# Altium PCB SMINVT VER1.PcbDoc
Units mm, origin at the board's own origin, x right, y up, seen from the top; angles counter-clockwise.
Board outline 201.55 x 45.47 mm, 2 copper layers (Top Layer, Bottom Layer); 78 components, 45 nets, 205 pads, 12 vias.
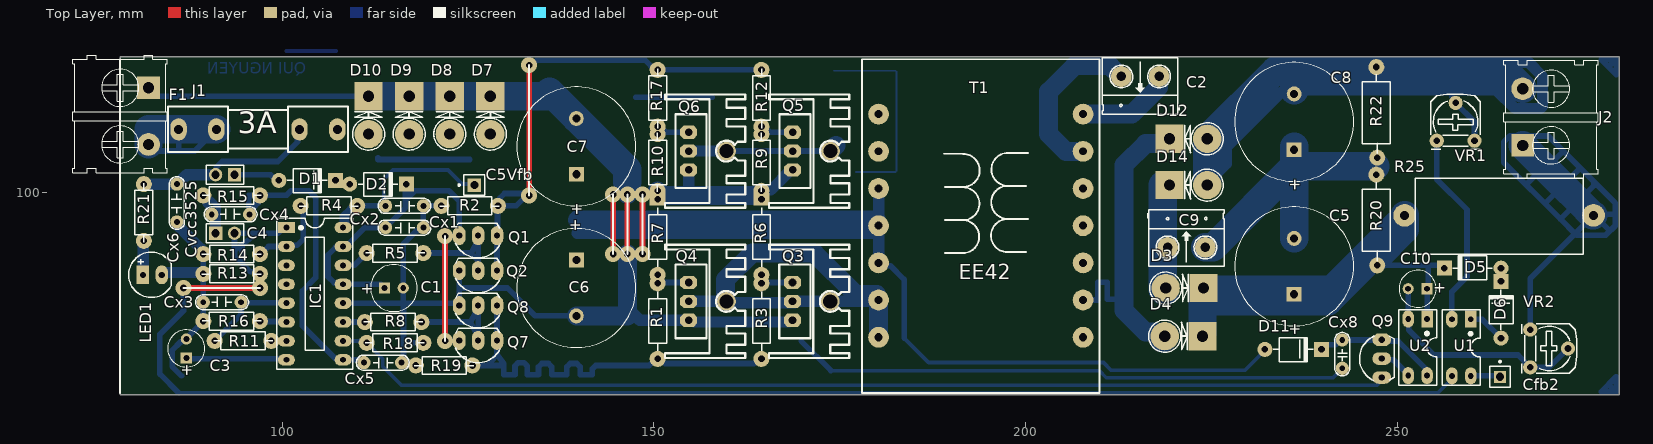
[diagram p0: Top Layer view]
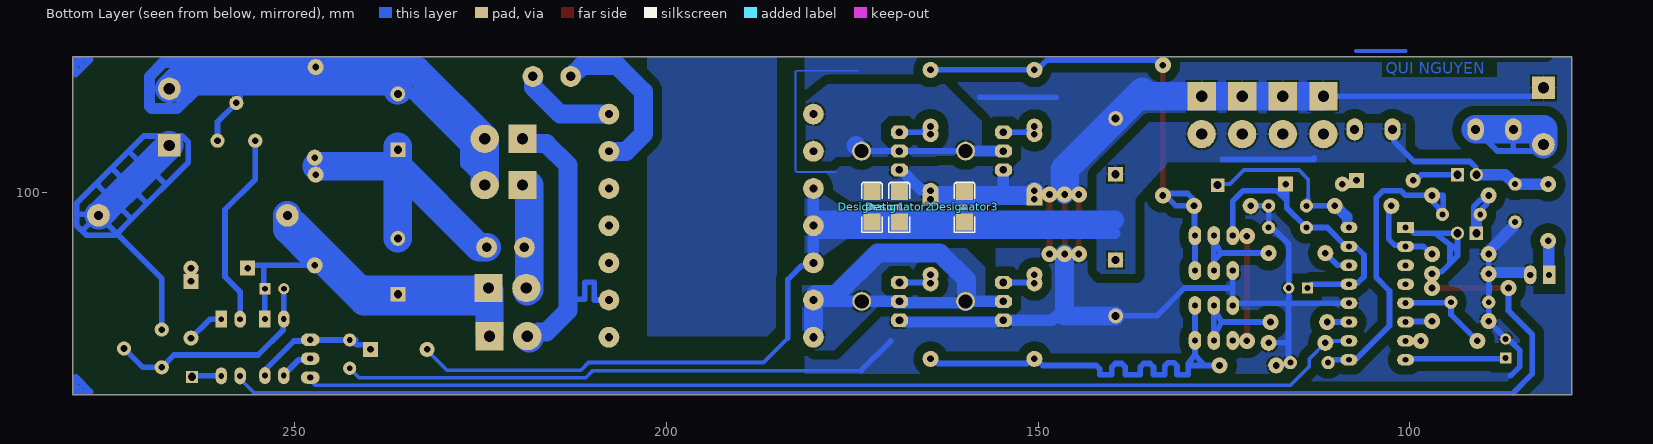
[diagram p1: Bottom Layer view, seen from below]

## Layer stack, top to bottom
Top Solder: solder mask 0.0102, Solder Resist, Dk 3.5
Top Layer: signal copper 0.0356
Dielectric 1: dielectric 0.32, FR-4, Dk 4.8
Bottom Layer: signal copper 0.0356
Bottom Solder: solder mask 0.0102, Solder Resist, Dk 3.5

## Board outline
78.232,72.771 78.232,118.237 279.781,118.237 279.781,72.771

## Design rules (kind name [scope] priority, off if disabled: settings)
Clearance [All] p1: gap=0.254 ignorepadtopadclearanceinfootprint=FALSE except(0: Arc-Hole Track-Hole SMDPad-Hole THPad-Hole Via-Hole Fill-Hole Poly-Hole Region-Hole Text-Hole; 1.27: Arc-Fill Arc-Poly Arc-Region Track-Fill Track-Poly Track-Region SMDPad-Fill SMDPad-Poly SMDPad-Region THPad-Fill THPad-Poly THPad-Region Via-Fill Via-Poly Via-Region Fill-Fill Fill-Poly Fill-Region Poly-Poly Poly-Region Region-Region)
PolygonConnect [All] p1: connectstyle=Relief reliefconductorwidth=0.254 reliefentries=4 polygonreliefangle="90 Angle" airgapwidth=0.254
RoutingVias [All] p1: holewidth=0.711 width=1.27 viastyle="Through Hole" minholewidth=0.711 minwidth=1.27 maxholewidth=0.711 maxwidth=1.27
SolderMaskExpansion [All] p1: expansion=0.102 istentingtop=FALSE
Width [All] p1: maxlimit=3.81 minlimit=0.762 preferedwidth=1.524
30 further rules are at their usual default settings.

## Components (designator, comment, footprint, x,y, rotation, side; value= is the part's Value field where it differs from the comment)
C1 "6.3R" CA-ALU-6.3R 115.042,87.122 r0 top value=104
C2 "Header 2" HED2 217.932,115.57 r180 top
C3 "10uF" CA-ALU-5L 87.122,78.994 r90 top value=104
C4 "JP2" JP2-D1T 91.059,94.488 r0 top
C5 "CN-ALU-DIP" CA-ALU-16 236.093,90.043 r90 top value=104
C5Vfb "JP1" JP1-D1T#1 125.857,100.965 r90 top
C6 "CN-ALU-DIP" CA-ALU-16 139.573,87.122 r270 top locked value=104
C7 "CN-ALU-DIP" CA-ALU-16 139.573,106.172 r90 top value=104
C8 "CN-ALU-DIP" CA-ALU-16 236.093,109.474 r90 top value=104
C9 "Header 2" HED2 219.075,92.583 r0 top
C10 "10uF" CA-ALU-5L 252.701,87.024 r180 top value=104
Cfb2 "JPvfb" JP1-D1T#2 263.779,75.184 r0 top
Cvcc3525 "JP2" JP2-D1T 93.599,102.362 r180 top
Cx1 "XXpF" CN2-O 116.459,95.123 r180 top value=33pF
Cx2 "100nF" CN2-O 116.459,98.044 r180 top value=33pF
Cx3 "1nF" CN2-O 91.948,85.344 r0 top value=33pF
Cx4 "1nF" CN2-O 93.091,97.155 r0 top value=33pF
Cx5 "1nF" CN2-O 113.538,76.962 r180 top value=33pF
Cx6 "100nF" CN2-O 85.725,98.552 r90 top value=33pF
Cx8 "XXpF" CN1.5 242.57,78.105 r90 top value=33pF
D1 "Diode" DIO-1A-SMALL 98.298,101.6 r180 top value=1N5007
D2 "Diode" DIO-1A-SMALL 107.823,101.092 r180 top value=1N5007
D3 "5AN" DIO-5AN 223.901,87.122 r180 top value=1N5007
D4 "5AN" DIO-5AN 223.774,80.645 r180 top value=1N5007
D5 "Diode" DIO-1A-SMALL 265.176,89.789 r0 top value=1N5007
D6 "Diode" DIO-1A-SMALL 263.906,79.121 r270 top value=1N5007
D7 "5AN" DIO-5AN 128.016,112.903 r270 top value=1N5007
D8 "5AN" DIO-5AN 122.555,112.903 r270 top value=1N5007
D9 "5AN" DIO-5AN 117.094,112.903 r270 top value=1N5007
D10 "5AN" DIO-5AN 111.633,112.903 r270 top value=1N5007
D11 "Diode" DIO-1A-SMALL 230.886,78.867 r180 top value=1N5007
D12 "5AN" DIO-5AN 219.329,107.188 r0 top value=1N5007
D14 "5AN" DIO-5AN 219.329,100.965 r0 top value=1N5007
Designator1 "Comment" DIO-SMD-106 172.339,98.044 r270 bottom
Designator2 "Comment" DIO-SMD-106 168.656,98.044 r270 bottom
Designator3 "Comment" DIO-SMD-106 159.893,98.044 r270 bottom
F1 "F1A" Fuse1 96.774,108.458 r0 top value=Fuse
IC1 "KA3525A" DIP16 100.584,95.25 r270 top
J1 "KF2" KF2-7.62 78.232,110.236 r270 top
J2 "OUT OSC" KF2-7.62 270.637,110.109 r90 top
LED1 "LED" LED-5-BLUE 82.423,88.9 r0 top value="LED 3 ly Single Colour"
Q1 "S9014" TO92-123 126.365,94.17 r180 top value=C9014
Q2 "C9015" QTO-92 126.365,89.471 r180 top
Q3 "IRF840" TO220H3 168.638,87.866 r270 top
Q4 "IRF840" TO220H3 154.668,87.866 r270 top
Q5 "IRF840" TO220H3 168.656,108.077 r270 top
Q6 "IRF840" TO220H3 154.668,108.077 r270 top
Q7 "S9014" TO92-123 126.365,80.073 r180 top value=C9014
Q8 "C9015" QTO-92 126.365,84.772 r180 top
Q9 "MCR100" TO92-123 247.875,77.626 r90 top value=C9014
R1 "Res" RES-1/4W#1 150.622,83.058 r90 top
R2 "10K" RES-1/4W-SMALL 124.968,98.171 r0 top
R3 "Res" RES-1/4W#1 164.592,83.058 r90 top
R4 "10K" RES-1/4W-SMALL 106.045,98.171 r0 top
R5 "10" RES-1/4W-SMALL 115.443,91.821 r180 top
R6 "Res" RES-1/4W#2 164.592,94.361 r90 top
R7 "Res" RES-1/4W#2 150.622,94.361 r90 top
R8 "10" RES-1/4W-SMALL 115.189,82.55 r180 top
R9 "10K" RES-1/4W-SMALL 164.465,104.267 r270 top
R10 "10K" RES-1/4W-SMALL 150.495,104.267 r270 top
R11 "27" RES-1/4W-SMALL 94.996,80.01 r180 top
R12 "10" RES-1/4W-SMALL 164.465,112.395 r90 top
R13 "1K" RES-1/4W-SMALL 92.964,89.027 r0 top
R14 "10K" RES-1/4W-SMALL 92.964,91.694 r0 top
R15 "470K" RES-1/4W-SMALL 93.472,99.568 r180 top
R16 "12K" RES-1/4W-SMALL 93.472,82.677 r180 top
R17 "10" RES-1/4W-SMALL 150.495,112.395 r90 top
R18 "Res" RES-1/4W-SMALL 114.935,79.756 r0 top
R19 "10K" RES-1/4W-SMALL 121.539,76.708 r0 top
R20 "220k" RES-1/2W 247.142,95.758 r90 top
R21 "10" RES-1/4W-SMALL 81.407,97.028 r90 top
R22 "220k" RES-1/2W 247.142,110.236 r90 top
R25 "5W" RES-5W 264.414,96.647 r0 top
T1 "EE42" "EE42 - ST9x9" 180.213,75.504 r0 top
U1 "PC817" DIP4 259.842,82.931 r180 top
U2 "PC817" DIP4 253.971,82.96 r180 top
VR1 "20K" VR-S2 255.27,106.934 r0 top value="Volume 50k"
VR2 "20K" VR-S2 267.843,81.534 r270 top value="Volume 50k"

## Footprints (in the part's own frame and the unit in brackets; to place one, negate y for a bottom-side part, rotate by r counter-clockwise, add the part's x,y. Pads: shape width x height; smd on the part's side, far side on the other; paste and mask are expansions set on the pad)
CA-ALU-5L [mm] "Polarized capacitors, Aluminum Electrolytic Capacitors, 2-Leads, Body 5x11x2x0.5"
  rect 1.5x1.5 hole 0.8: 1(-1.27,0)
  round 1.5 hole 0.8: 2(1.27,0)
  silkscreen extent -2.5,-2.5 2.5,2.5, body extent -2.54,-2.54 2.54,2.54, height 13.9
CA-ALU-6.3R [mm] "Polarized capacitors, Aluminum Electrolytic Capacitors, 2-Leads, Body 6.3x15x2.5x0.5"
  rect 1.5x1.5 hole 0.8: 1(-1.25,0)
  round 1.5 hole 0.8: 2(1.25,0)
  silkscreen extent -3.15,-3.15 3.15,3.15, body extent -3.12,-3.13 3.14,3.15, height 15.26
CA-ALU-16 [mm] "Polarized capacitors, Aluminum Electrolytic Capacitors, 2-Leads, Body 16x21x7.5x0.8"
  rect 2x2 hole 1.1: 1(-3.75,0)
  round 2 hole 1.1: 2(3.75,0)
  silkscreen extent -8,-8 8,8, body extent -7.93,-7.96 7.99,8, height 21.31
CN1.5 [mil]
  round 70 hole 31: 1(-70,0) 2(80,0)
  silkscreen extent -110,-40 120,40, body extent -110,-33 120,33, height 235
CN2-O [mil]
  round 70 hole 31: 1(-100,-5) 2(100,-5)
  silkscreen extent -140,-45 140,35, body extent -139,-56 139,46, height 360
DIO-1A-SMALL [mil] "Diode 1A, W 100mil, L 350mil"
  round 80 hole 35: 1(-50,0)
  rect 80x80 hole 35: 2(-350,0)
  silkscreen extent -305,-61 -95,65, body extent -366,-61 -34,65, height 122
DIO-5AN [mil] "Diode 5A, W 200mil, L 250mil"
  round 150 hole 60: 1(200,0)
  rect 150x150 hole 60: 2(0,0)
  silkscreen extent 81,-85 285,85, body extent -32,-111 222,90, height 451
DIO-SMD-106 [mil]
  rect 90x90.55 smd: 1(80,0) 2(-80,0)
  silkscreen extent -130,-55 135,55, body extent -99,-50 106,52, height 95
DIP4 [mil]
  rect 60x90 hole 31: 1(0,0)
  oval 60x90 hole 31: 2(100,0) 3(100,300) 4(0,300)
  silkscreen extent -50,-50 150,350, body extent -59,-10 159,305, height 170
DIP16 [mil]
  rect 60x90 hole 31: 1(0,0)
  oval 60x90 hole 31: 2(100,0) 3(200,0) 4(300,0) 5(400,0) 6(500,0) 7(600,0) 8(700,0) 9(700,300) 10(600,300) 11(500,300) 12(400,300) 13(300,300) 14(200,300) 15(100,300) 16(0,300)
  silkscreen extent -50,-50 750,350, body extent -52,-53 752,360, height 317
"EE42 - ST9x9" [mm]
  rect 0x0 all layers, no hole: 1(0,0)
  round 2.8 hole 1.08: 2(0,5) 3(0,10) 4(0,15) 5(0,20) 6(0,25) 8(0,35) 11(27.5,35) 13(27.5,25) 14(27.5,20) 15(27.5,15) 16(27.5,10) 17(27.5,5)
  round 2.8 hole 1.05: 7(0,30) 12(27.5,30)
  round 0 all layers, no hole: 9(0,40) 10(27.5,40) 18(27.5,0)
  silkscreen extent -2.25,-2.5 29.7,42.38, body extent -2.33,-2.54 29.77,42.46, height 46.62
Fuse1 [mm]
  oval 2.2x3 hole 1.2: 1(-10.684,0) 1(-5.604,0) 2(5.579,0) 2(10.659,0)
  silkscreen extent -12.12,-3.05 12.09,3.05, body extent -10.84,-2.95 10.87,2.95, height 9.75
HED2 [mil] "Header 2, 2 pin, hight 300mil, Pin to Pin 200, Colour Green"
  round 110 hole 50: 1(0,0) 2(200,0)
  silkscreen extent -106,-100 300,200, body extent -92,-90 302,205, height 394
JP1-D1T#1 [mm] "1pins, 1 row, straight, gold plating"
  rect 1.8x1.8 hole 1.1: 1(0,0)
  silkscreen extent -1.4,-1.4 1.4,2.17, body extent -1.27,-1.27 1.27,1.27, height 8.54
JP1-D1T#2 [mm] "1pins, 1 row, straight, gold plating"
  rect 1.6x1.6 hole 1.1: 1(0,0)
  silkscreen extent -1.4,-1.4 1.4,2.17, body extent -1.27,-1.27 1.27,1.27, height 8.54
JP2-D1T [mm] "2 pins, 1 row, straight, gold plating"
  rect 1.8x1.8 hole 1.1: 1(0,0)
  round 1.8 hole 1.1: 2(2.54,0)
  silkscreen extent -1.27,-1.27 3.81,1.27, body extent -1.27,-1.27 3.81,1.27, height 8.54
KF2-7.62 [mil]
  rect 120x120 hole 59.06 unplated: 1(-150,150)
  round 120 hole 59.06 unplated: 2(150,150)
  silkscreen extent -324,-250 300,250, body extent -300,-241 300,231, height 337
LED-5-BLUE [mil] "LED 2 PIN, 5 ly , Only colour, pin to pin 110mil"
  rect 65x100 hole 32: 1(-45,0)
  oval 65x100 hole 32: 2(55,0)
  silkscreen extent -120,-120 104,120, body extent -113,-120 100,117, height 339
QTO-92 [mil] "TO-92"
  oval 66x100 hole 32: 1(-100,0) 2(0,0) 3(100,0)
  silkscreen extent -117,-65 120,118, body extent -109,-66 109,95, height 245
RES-1/2W [mil]
  round 85 hole 35: 1(-220,-5) 2(260,0)
  silkscreen extent -195,-74 221,75, body extent -230,-60 270,56, height 121
RES-1/4W#1 [mil]
  round 85 hole 35: 1(-215,5) 2(185,5)
  silkscreen extent -173,-42 141,52, body extent -227,-42 197,52, height 95
RES-1/4W#2 [mil]
  round 85 hole 35: 1(-215,5)
  rect 66.93x85 hole 35: 2(185,5)
  silkscreen extent -173,-42 141,52, body extent -227,-42 197,52, height 95
RES-1/4W-SMALL [mil]
  round 85 hole 35: 1(-140,0) 2(160,0)
  silkscreen extent -148,-47 166,47, body extent -152,-47 172,47, height 97
RES-5W [mil] "R5W , 2 pin, 400 x 950mil"
  round 120 hole 47.24: 1(-530,10) 2(470,10)
  silkscreen extent -475,-195 415,205, body extent -550,-185 490,197, height 363
TO92-123 [mil] "TO-92"
  oval 66x100 hole 32: 1(-100,0) 2(0,0) 3(100,0)
  silkscreen extent -117,-65 120,118, body extent -109,-66 109,95, height 245
TO220H3 [mil] "TO-220 1-2-3"
  oct 70x90 hole 40: 1(0,0) 2(100,0) 3(200,0)
  round 100 hole 75: 2(100,200)
  silkscreen extent -200,-125 400,300, body extent -190,-102 392,323, height 984
VR-S2 [mil] "Resistor Variable"
  round 75 hole 35: 1(0,0) 2(100,200) 3(200,0)
  silkscreen extent -31,-44 231,246, body extent -87,-30 307,372, height 165

## Part data
C1 C3 C10: library part CN-ALU-DIP, "Capacitor (Semiconductor SIM Model)", LatestRevisionDate=17-Jul-2002, LatestRevisionNote="Re-released for DXP Platform.", PackageReference=C1206, Publisher="Altium Limited"
C2 C9: "Header 2 (Green)"
C4 C5Vfb Cvcc3525: "WR-PHD 2.54 mm Angled Socket Header", Manufacturer="W¨¹rth Elektronik eiSos GmbH", partNo=613002143121, ComponentLink1 Description=Manufacturer, ComponentLink1URL=http://www.we-online.com, ComponentLink2 Description=Datasheet, ComponentLink2URL=http://katalog.we-online.de/em/datasheet/6130xx143121.pdf, Created by="Karrer Zheng", Created Date="29 March 2013", NoPins=02
C5 C6 C7 C8: "Capacitor (Semiconductor SIM Model)", LatestRevisionDate=17-Jul-2002, LatestRevisionNote="Re-released for DXP Platform.", PackageReference=C1206, Publisher="Altium Limited"
Cfb2: library part JP1, "WR-PHD 2.54 mm Angled Socket Header", Manufacturer="W¨¹rth Elektronik eiSos GmbH", partNo=613002143121, ComponentLink1 Description=Manufacturer, ComponentLink1URL=http://www.we-online.com, ComponentLink2 Description=Datasheet, ComponentLink2URL=http://katalog.we-online.de/em/datasheet/6130xx143121.pdf, Created by="Karrer Zheng", Created Date="29 March 2013", NoPins=02
Cx1 Cx2 Cx3 Cx4 Cx5 Cx6 Cx8: library part CN
D1 D2 D5 D6 D11: "Default Diode", Code - JEDEC=DO-214-AB, Published=8-Jun-2000, Publisher="Altium Limited", Revision="July-2002: Re-released for DXP Platform."
D3 D4 D7 D8 D9 D10 D12 D14: library part Diode, "Default Diode", Code - JEDEC=DO-214-AB, Published=8-Jun-2000, Publisher="Altium Limited", Revision="July-2002: Re-released for DXP Platform."
F1: library part Fuse, "Fuse", Designed by=VanDungEvn
IC1: "SMPS Controller"
J1: Manufacturer="Würth Elektronik eiSos GmbH", partNo=691103110002, ComponentLink1 Description=Manufacturer, ComponentLink1URL=http://www.we-online.com, ComponentLink2 Description=Datasheet, ComponentLink2URL=http://katalog.we-online.de/em/datasheet/6911031100xx.pdf, Created by="Karrer Zheng", Created Date="29 October 2013", NoPins=2
J2: library part KF2, Manufacturer="Würth Elektronik eiSos GmbH", partNo=691103110002, ComponentLink1 Description=Manufacturer, ComponentLink1URL=http://www.we-online.com, ComponentLink2 Description=Datasheet, ComponentLink2URL=http://katalog.we-online.de/em/datasheet/6911031100xx.pdf, Created by="Karrer Zheng", Created Date="29 October 2013", NoPins=2
LED1: "LED Single colour Green and Red"
Q1 Q7: "PNP 600mW, EBC"
Q2 Q8: library part C9013, "PNP 600mW, EBC"
Q3 Q4 Q5 Q6: "MOSFET N - CHANNEL 500V - 0.75 - 8A - TO-220"
Q9: library part S9014, "PNP 600mW, EBC"
R1 R3 R6 R7 R18: Manufacturer="Generic Components", Class=Passive, Published=08/06/2000, Publisher="Altium Hobart Technology Centre", SubClass=R
R2 R4 R5 R8 R9 R10 R11 R12 R13 R14 R15 R16 R17 R19 R20 R21 R22 R25: library part Res, "Res", Manufacturer="Generic Components", Class=Passive, Published=08/06/2000, Publisher="Altium Hobart Technology Centre", SubClass=R
T1: "Bien ap xung ee42"
U1 U2: "Single Opto"
VR1 VR2: library part VR-S, "Var Resistor"

## Via types
v1: diameter 2.159, hole 0.889, Top Layer to Bottom Layer, 12 vias

## Nets (pads, with @x,y where several pads share a name; then routed paths per layer and width w, separated by ;. In a path a pad name is that pad's centre, name@x,y a point inside that pad or via, vN(x,y) a via of type N, cw(c..) or ccw(c..) an arc to the next point about the centre after c; other vN are vias at no path point)
+5: C5Vfb.1 Cx2.2 IC1.16 R4.2 | length 28.9
  Bottom Layer w0.508: 113.665,99.125 113.665,101.727 114.935,102.997 122.301,102.997 124.206,101.092 C5Vfb.1@125.73,101.092
  Bottom Layer w0.762: 113.725,99.066 113.725,98.365 Cx2.2 R4.2 ; C5Vfb.1@125.73,101.092 C5Vfb.1 ; R4.2 109.842,97.904 109.207,97.904 108.077,96.774 108.077,95.377 IC1.16 108.379,95.25 108.731,95.602 108.731,96.415 110.109,97.793 R4.2
+12: C6.1 C7.1 Cvcc3525.2 Cx6.2 D7.1 D8.1 D9.1 D10.1 D11.1 Designator1.1 Designator2.1 Designator3.1 F1.2 R21.2 T1.4 T1.5 T1.6 | length 191.4
  Bottom Layer w0.508: 183.642,80.391 186.944,77.089 210.439,77.089 211.455,76.073 229.489,76.073 D11.1@232.41,78.994
  Bottom Layer w0.762: 91.136,103.328 91.948,104.14 99.441,104.14 102.077,106.776 102.077,108.183 F1.2@102.353,108.458 ; 112.903,104.648 112.903,104.394 125.222,104.394 ; T1.4 180.603,90.114 181.793,90.114 183.642,88.265 183.642,80.391
  Bottom Layer w1.524: R21.2 Cx6.2 85.921,101.092 87.191,102.362 Cvcc3525.2 ; 139.7,94.488 T1.5@179.959,94.488 ; T1.4 180.213,94.488 T1.5 T1.6
  Bottom Layer w2.54: 139.7,96.266 156.845,96.266 168.529,96.266 172.212,96.266 173.609,96.266 175.006,96.266 T1.5@179.959,96.266
+300: C5.1 C10.1 D3.2 D4.2 D5.2 R20.1 R25.1 U2.1 | length 84.8
  Bottom Layer w0.762: R20.1 254.127,90.17 ; U2.1 C10.1 254.127,87.024 254.127,90.17 ; D5.2@255.651,89.154 D5.2 256.286,90.17 254.127,90.17
  Bottom Layer w1.524: D3.2 224.79,88.011 240.665,88.011 244.157,91.504 249.263,96.609 250.66,96.609 R25.1
  Bottom Layer w3.81: D4.2@223.774,81.026 D3.2@223.774,86.773 ; D3.2@224.282,85.344 236.093,85.344 240.665,85.344 241.998,86.677 245.491,90.17 ; 247.269,91.313 250.952,94.996 R25.1
-300: C8.2 D12.1 D14.1 J2.2 R22.2 VR1.2 VR1.3 | length 129.8
  Bottom Layer w0.762: 258.445,116.332 257.302,115.189 257.302,113.665 257.302,112.831 257.81,112.323 VR1.2 260.35,109.474 VR1.3
  Bottom Layer w1.524: D14.1 224.409,101.304 226.949,103.844 226.949,106.045 234.311,113.407 235.781,113.407 235.873,113.315 C8.2@235.964,113.315 ; C8.2 236.661,113.792 263.271,113.792 265.811,111.252 269.189,111.252 269.494,111.557 269.494,115.57 267.589,117.475 264.16,117.475
  Bottom Layer w3.81: D14.1@224.409,101.304 D12.1@224.409,106.934 ; D12.1 233.523,116.302 233.553,116.332 236.093,116.332 ; C8.2@236.093,113.732 236.093,116.332 ; J2.2 264.414,116.332 258.445,116.332 247.142,116.332 236.093,116.332
AC1: D4.1 D12.2 T1.16 | length 44.6
  Bottom Layer w0.762: T1.16 209.677,85.504 209.677,87.884 210.947,87.884 210.947,85.598 213.139,85.598 213.139,85.504
  Bottom Layer w1.524: 213.139,85.504 213.233,85.598 213.487,85.852
  Bottom Layer w2.54: D4.1@218.683,80.888 217.553,80.888 217.247,81.194 216.113,81.194 213.233,84.074 213.233,85.598 213.233,103.668 216.118,106.553 218.694,106.553 D12.2@218.694,107.061
  Bottom Layer w3.81: D4.1@218.426,80.377 D4.1
FB: C4.2 IC1.1 R13.2 U1.3 | length 219.9
  Top Layer w0.762: v1(86.741,87.122) v1(97.028,87.122)
  Bottom Layer w0.508: 86.106,73.025 255.397,73.025 257.302,74.93 U1.3
  Bottom Layer w0.762: 86.106,73.025 83.566,75.565 83.566,80.899 86.741,84.074 v1(86.741,87.122) ; 94.615,92.837 94.615,90.678 94.361,90.678 ; 96.444,94.336 93.599,92.202 ; R13.2 96.761,89.294 95.745,89.294 94.361,90.678 ; IC1.1 100.203,95.25 99.441,94.488 C4.2 93.599,92.202 ; 93.599,92.202 93.599,91.44 94.361,90.678
GND: C1.2 C3.2 C6.2 C7.2 Cx1.1 Cx2.1 Cx3.1 Cx5.1 Cx6.1 Cx8.1 D7.2 D8.2 D9.2 D10.2 Designator1.2 Designator2.2 Designator3.2 IC1.12 J1.1 LED1.2 Q2.3 Q3.3 Q4.3 Q5.3 Q6.3 Q8.3 R2.1 R6.2 R7.2 R9.2 R10.2 R13.1 R14.1 R16.2 R18.2 R19.1 | length 368.5
  Top Layer w0.762: v1@144.526,91.313 v1(144.526,91.694) v1(144.526,99.695) ; v1(146.431,91.694) v1(146.431,99.695) ; v1(148.463,91.694) v1(148.463,99.695)
  Bottom Layer w0.254: 174.244,116.332 182.477,116.332 182.626,116.183 182.626,102.892 182.477,102.743 177.166,102.743
  Bottom Layer w0.508: 173.797,76.012 209.865,76.012 210.82,75.057 241.3,75.057 Cx8.1
  Bottom Layer w0.762: J1.1 J1.1@82.55,113.538 ; J1.1@82.55,112.903 D10.2 ; 86.487,75.311 85.217,76.581 85.217,78.74 86.372,79.895 86.553,79.895 86.922,80.264 C3.2 87.122,80.328 89.408,82.614 R16.2 Cx3.1 R13.1 R14.1 ; IC1.12@108.14,85.026 IC1.12 116.332,85.09 ; 116.459,79.756 R18.2 ; R19.1 117.792,76.898 116.268,76.898 Cx5.1 116.272,77.283 116.272,77.984 116.332,78.043 116.332,85.09 ; R2.1 Cx2.1 Cx1.1 118.724,95.25 118.303,94.829 118.07,94.829 116.292,93.051 C1.2 116.292,85.13 116.332,85.09 ; Q2.3 123.825,87.122 ; C6.2 134.052,83.372 130.302,87.122 123.825,87.122 ; 147.574,112.776 157.861,112.776 ; 169.799,80.01 173.797,76.012 ; 116.332,85.09 123.507,85.09 Q8.3 123.825,87.122
  Bottom Layer w1.524: LED1.2 83.82,89.159 83.879,89.218 89.046,89.218 89.236,89.027 R13.1 ; Cx6.1 85.901,95.963 85.901,95.582 89.09,92.393 89.09,92.183 89.408,91.866 R14.1 ; 146.558,84.328 148.1,82.786 Q4.3 154.795,82.659 155.305,82.659 155.414,82.55 168.148,82.55 168.384,82.786 Q3.3 ; Q6.3 154.668,99.713 154.813,99.568 ; R9.2 164.587,100.325 165.73,100.325 168.402,102.997 Q5.3
  Bottom Layer w2.54: C6.2 146.431,83.372 v1(146.431,91.694) ; v1(146.431,99.695) 146.431,101.38 ; R10.2 R7.2@151.13,99.568 ; R7.2@151.003,99.568 R7.2@151.13,99.568 ; R6.2@163.957,99.568 156.845,99.568 154.813,99.568 R7.2@151.13,99.568
  Bottom Layer w3.81: D10.2 D9.2 D8.2 D7.2 135.957,112.903 ; 135.957,113.538 C7.2 146.431,103.064 146.431,101.38
NetC1_1: C1.1 Cx1.2 D2.2 IC1.13 IC1.15 Q1.3 Q7.3 | length 59.5
  Top Layer w0.762: v1(121.92,80.01) v1(121.92,94.107)
  Bottom Layer w0.762: C1.1 113.284,87.63 IC1.13 108.058,87.776 107.042,87.776 106.172,88.646 106.172,91.567 107.169,92.564 108.058,92.564 IC1.15 108.585,92.71 111.125,95.25 Cx1.2 116.586,97.917 116.586,98.933 ; D2.2@116.713,101.6 116.586,101.473 116.586,98.933 ; D2.2@117.032,100.203 122.428,100.203 123.825,98.806 Q1.3 123.793,94.139 121.952,94.139 v1(121.92,94.107) ; 117.729,100.076 116.586,98.933 ; v1(121.92,80.01) 121.952,80.042 123.793,80.042 Q7.3
NetC2_1: C2.1 T1.11 | length 13.1
  Bottom Layer w2.54: T1.11 214.263,110.504 217.883,114.124 217.883,115.521 C2.1
NetC2_2: C2.2 T1.12 | length 23.1
  Bottom Layer w2.54: T1.12 205.392,105.504 203.073,107.823 203.073,113.538 206.563,117.028 211.325,117.028 212.783,115.57 C2.2
NetC3_1: C3.1 IC1.8 | length 13.6
  Bottom Layer w0.762: C3.1 87.249,77.597 100.457,77.597 IC1.8
NetC4_1: C4.1 Cx4.1 R15.2 | length 12.2
  Bottom Layer w0.762: Cx4.1 90.678,96.901 90.678,94.869 C4.1 91.44,94.869 91.44,97.028 91.44,98.044 90.472,99.012 90.342,99.012 89.786,99.568 R15.2 89.675,99.301 89.675,98.412 90.805,97.282 Cx4.1@90.932,97.155
NetC5_2: C5.2 C8.1 C9.2 R20.2 R22.1 | length 39.8
  Bottom Layer w3.81: C9.2 225.171,92.583 236.093,103.505 ; C5.2 236.093,103.505 ; C8.1@236.093,105.597 236.093,103.505 ; C8.1@236.093,105.978 C8.1 C8.1@236.093,106.105 ; 247.015,103.505 236.093,103.505
NetC9_1: C9.1 D3.1 D14.2 | length 14.4
  Bottom Layer w3.81: D14.2@218.44,100.933 218.44,92.583 218.44,86.9 D3.1@218.694,86.646
NetC10_2: C10.2 U2.2 VR2.2 VR2.3 | length 30.1
  Bottom Layer w0.762: C10.2 U2.2 251.508,82.883 251.508,81.486 254.889,78.105 266.192,78.105 VR2.3 270.383,76.454 VR2.2
NetCfb2_1: Cfb2.1 U1.4 | length 4.1
  Bottom Layer w0.762: U1.4 263.779,75.311 Cfb2.1
NetCvcc3525_1: Cvcc3525.1 D1.1 | length 6.3
  Bottom Layer w0.762: Cvcc3525.1 98.462,102.362 99.224,101.6 D1.1
NetCx3_2: Cx3.2 IC1.5 R11.2 | length 12.8
  Bottom Layer w0.762: R11.2 94.488,83.566 Cx3.2 94.551,85.153 100.52,85.153 IC1.5
NetCx4_2: Cx4.2 Cx5.2 IC1.9 R15.1 | length 43.6
  Bottom Layer w0.762: Cx4.2@95.504,97.028 95.504,99.568 R15.1 ; Cx4.2 95.631,97.303 96.115,97.787 96.115,97.893 96.761,98.539 96.761,99.301 R15.1 ; Cx5.2 110.723,77.089 110.342,77.47 IC1.9 108.058,77.616 107.169,77.616 102.743,82.042 102.743,86.741 104.521,88.519 104.521,99.314 103.632,100.203 101.219,100.203 100.632,99.616 97.076,99.616 R15.1
NetD1_2: D1.2 D2.1
NetD5_1: D5.1 D6.2
NetD6_1: D6.1 U1.1 | length 5.1
  Bottom Layer w0.762: U1.1 261.366,82.931 D6.1
NetF1_1: F1.1 J1.2 | length 24.5
  Bottom Layer w0.762: J1.2 82.661,106.426 83.55,105.537 88.249,105.537 F1.1@91.17,108.458 ; 86.09,105.791 F1.1@86.09,108.458
  Bottom Layer w3.81: J1.2 82.042,108.458 86.09,108.458 F1.1@91.17,108.458
NetIC1_2: IC1.2 R4.1 R14.2 | length 11.3
  Bottom Layer w0.762: R14.2 97.157,91.694 98.173,92.71 IC1.2 100.73,92.856 102,92.856 102.87,93.726 102.87,97.412 102.489,97.793 R4.1
NetIC1_6: IC1.6 R16.1 | length 3.6
  Bottom Layer w0.762: R16.1 97.091,82.614 100.52,82.614 IC1.6
NetIC1_7: IC1.7 R11.1
NetIC1_11: IC1.11 R8.2 | length 2.9
  Bottom Layer w0.762: IC1.11 R8.2
NetIC1_14: IC1.14 R5.2 | length 3.9
  Bottom Layer w0.762: IC1.14 108.218,90.184 109.742,90.184 R5.2
NetJ2_1: J2.1 R25.2 VR2.1 | length 101.4
  Bottom Layer w0.762: 265.145,107.6 264.287,106.742 264.287,104.013 271.907,96.393 273.876,94.424 ; 265.176,107.569 270.256,107.569 272.415,105.41 ; 267.462,101.219 269.685,103.441 ; VR2.1 267.843,88.392 273.876,94.424 ; 269.875,98.552 272.224,100.901 274.574,103.251 ; 269.938,103.188 272.161,105.41 272.415,105.41 ; 272.034,96.52 274.32,98.806 276.416,100.901 276.416,101.409 ; R25.2@277.368,97.028 279.273,97.028 ; 278.447,94.932 276.479,96.901 R25.2 273.876,94.424 ; 272.415,105.41 274.574,103.251 ; 273.876,94.424 274.066,94.234 278.003,94.234 279.273,95.504 279.273,97.028 ; 274.574,103.251 276.416,101.409 ; 276.416,101.409 279.273,98.552 279.273,97.028
  Bottom Layer w3.81: J2.1 269.685,103.441 269.938,103.188 272.224,100.901 274.32,98.806 276.225,96.901 R25.2
NetLED1_1: LED1.1 R21.1 | length 4.6
  Bottom Layer w1.524: LED1.1 81.343,88.963 81.343,93.408 R21.1
NetLED3_1: 
NetQ1_2: Q1.2 Q2.2 R5.1 | length 14.8
  Bottom Layer w0.762: R5.1 125.349,91.821 126.365,90.805 ; 125.422,91.748 126.49,93.764 Q1.2 ; Q2.2 126.365,89.789 126.365,90.805 ; Q1.2@126.365,93.739 126.365,90.805
NetQ3_1: Q3.1 R3.2 R6.1 | length 5.3
  Bottom Layer w0.762: R3.2@164.456,87.739 164.456,88.12 164.456,88.891 R6.1 ; R3.2@164.505,87.866 Q3.1
NetQ3_2: Q3.2 Q4.2 T1.2 T1.3 | length 57.6
  Bottom Layer w1.524: Q4.2@154.668,85.326 159.748,85.326 159.942,85.132 Q3.2@168.91,85.132 ; Q3.2@168.638,85.326 173.718,85.326 T1.3@179.832,85.326
  Bottom Layer w2.54: Q4.2@159.748,85.326 159.621,85.453 159.621,88.247 163.195,91.821 171.577,91.821 177.132,86.266 T1.3@179.959,86.266 ; T1.2 T1.3
NetQ4_1: Q4.1 R1.2 R7.1 | length 5.6
  Bottom Layer w0.762: R1.2@150.477,87.743 R1.2@150.486,87.752 ; R7.1 150.486,88.891 150.486,88.129 150.486,87.757 R1.2@150.486,87.752 ; Q4.1 150.731,87.866 150.486,87.621 R1.2@150.486,87.752
NetQ5_1: Q5.1 R9.1 R12.1 | length 4.5
  Bottom Layer w0.762: R12.1 164.843,108.839 165.605,108.077 Q5.1
NetQ5_2: Q5.2 Q6.2 T1.7 T1.8 | length 20.1
  Bottom Layer w0.762: Q6.2@159.748,105.537 168.656,105.537 Q5.2@173.736,105.537
  Bottom Layer w1.524: Q6.2@154.668,105.537 Q6.2@159.748,105.537
  Bottom Layer w2.54: Q5.2@173.736,105.537 Q5.2@174.465,106.266
NetQ6_1: Q6.1 R10.1 R17.1 | length 4.5
  Bottom Layer w0.762: R17.1 150.873,108.839 151.635,108.077 Q6.1
NetQ7_2: Q7.2 Q8.2 R8.1 | length 15.6
  Bottom Layer w0.762: R8.1 125.349,82.55 ; Q7.2 Q7.2@126.365,80.505 ; Q8.2 Q8.2@126.365,84.341 ; 125.349,82.55 125.705,83.178 Q8.2@126.365,84.341 ; 125.349,82.55 Q7.2@126.365,80.505 ; Q7.2@126.365,80.505 Q8.2@126.365,84.341
NetQ9_2: Q9.2 U2.3 | length 4.5
  Bottom Layer w0.762: Q9.2 248.031,77.47 249.428,77.47 U2.3@251.031,75.867 ; U2.3@251.822,75.267 U2.3@251.822,75.838
NetU1_2: U1.2 VR1.1 | length 26.5
  Bottom Layer w0.762: VR1.1 255.27,101.727 259.334,97.663 259.334,88.646 257.302,86.614 U1.2
sutdown: IC1.10 Q9.1 R18.1 | length 143.5
  Bottom Layer w0.508: IC1.10 R18.1@111.379,80.01 ; R18.1 113.538,77.597 113.538,76.581 116.078,74.041 247.269,74.041 Q9.1@248.285,75.057
"VCC safe": Cx8.2 D11.2 Q9.3 U2.4 | length 17.8
  Bottom Layer w0.762: D11.2 240.411,79.502 241.66,79.502 242.295,80.137 247.845,80.137 Q9.3 248.05,79.991 250.082,79.991 253.825,76.248 253.825,75.414 U2.4@254,75.238 ; Cx8.2@241.779,80.166 Cx8.2@242.295,80.166
X1: Q1.1 Q2.1 R2.2 R12.2 R17.2 | length 68.6
  Top Layer w0.762: v1(133.223,99.568) v1(133.223,117.094)
  Bottom Layer w0.762: Q2.1 Q1.1 128.969,94.234 128.969,98.108 R2.2 ; v1(133.223,117.094) 133.601,117.094 134.236,117.729 148.847,117.729 150.117,116.459 R17.2 R12.2 ; R2.2 129.299,98.438 129.299,99.228 129.893,99.822 132.969,99.822 v1(133.223,99.568) 132.874,99.568 131.477,98.171 129.153,98.171 129.093,98.232 R2.2
X2: Q7.1 Q8.1 R1.1 R3.1 R19.2 | length 59.6
  Bottom Layer w0.762: R19.2 127.635,76.708 ; Q8.1 Q7.1 128.905,78.105 ; 129.54,76.708 127.635,76.708 ; R1.1@150.239,77.597 149.35,76.708 142.178,76.708 141.732,76.262 141.732,75.438 140.081,75.438 140.081,76.516 139.635,76.962 138.749,76.962 138.303,76.516 138.303,75.438 136.271,75.438 136.271,76.516 135.825,76.962 134.939,76.962 134.493,76.516 134.493,75.438 132.969,75.438 132.969,76.643 132.523,77.089 131.764,77.089 131.318,76.643 131.318,75.438 129.809,75.438 129.809,76.974 128.905,78.105 ; R1.1 150.873,77.597 151.508,76.962 163.452,76.962 164.087,77.597 R3.1 ; 127.635,76.708 128.095,77.214 128.905,78.105
pads on no net: IC1.3 IC1.4 T1.1 T1.9 T1.10 T1.13 T1.14 T1.15 T1.17 T1.18
copper on no net: | length 23.5
  Bottom Layer w0.508: 100.585,118.999 107.292,118.999
  Bottom Layer w0.762: 278.384,74.168 279.4,73.152 ; 278.384,116.84 277.368,117.856 279.4,117.856 ; 278.384,116.84 279.4,115.824 279.4,117.856 ; 278.384,116.84 279.4,117.856 ; 279.4,73.152 279.4,75.184 277.368,73.152 279.4,73.152

## Polygon pours and split planes (outlines as drawn)
GND on Bottom Layer "GND_L02_P004" (solid, remove dead copper, pour order 4): 78.232,118.237 78.232,72.771 155.702,72.771 155.702,118.237
no net on Bottom Layer "NONET_L02_P009" (solid, pour order 9): 185.166,118.237 185.166,80.645 202.565,80.645 202.565,118.237
GND on Bottom Layer "GND_L02_P007" (solid, remove dead copper, pour order 7): 152.527,118.237 152.527,73.025 181.356,73.025 181.356,118.237
+12 on Bottom Layer "+12_L02_P000" (solid, remove dead copper, pour order 0): 100.584,109.286 100.584,104.013 132.472,104.013 136.906,99.138 136.906,89.027 141.605,89.027 142.113,89.535 142.113,102.362 135.064,109.411
+12 on Bottom Layer "+12_L02_P002" (solid, remove dead copper, pour order 2): 181.356,101.376 181.356,89.694 172.9,95.683
NetQ5_2 on Bottom Layer "NETQ5_2_L02_P005" (solid, remove dead copper, pour order 5): 157.607,106.299 157.607,104.902 163.703,104.902 163.83,104.775 177.165,104.775 178.054,103.886 181.356,103.886 182.118,104.648 182.118,111.402 178.266,114.554 162.56,114.554 157.545,109.539
NetQ3_2 on Bottom Layer "NETQ3_2_L02_P006" (solid, remove dead copper, pour order 6): 157.099,84.582 157.099,89.916 160.147,92.964 172.339,92.964 177.8,87.503 181.737,87.503 181.737,79.502 180.975,78.74 177.419,78.74 171.577,84.582

## Other copper
Bottom Layer:
  text "QUI NGUYEN" at 103.251,115.951 h1.52

## Silkscreen, mask and mechanical layers (free items; w line width, h text height)
Top Overlay:
  lines w0.254: 78.232,73.025 78.232,117.884 ; 86.741,87.122 97.028,87.122 ; 121.92,80.01 121.92,94.107 ; 133.223,99.568 133.223,117.094 ; 144.526,91.694 144.526,99.695 ; 146.431,91.694 146.431,99.695 ; 148.463,91.694 148.463,99.695

## Text inside footprints (layer, text, board x,y; h text height)
C1: Top Overlay "+" at 110.567,86.385 h1.5
C3: Top Overlay "+" at 87.859,75.169 h1.5 r90
C5: Top Overlay "+" at 236.83,80.718 h1.5 r90
C6: Top Overlay "+" at 138.836,96.447 h1.5 r270
C7: Top Overlay "+" at 140.31,96.847 h1.5 r90
C8: Top Overlay "+" at 236.83,100.149 h1.5 r90
C10: Top Overlay "+" at 256.526,87.761 h1.5 r180
F1: Top Overlay "3A" at 94.031,106.909 h5